# Altium PCB PCB1.PcbDoc
Units mm, origin at the board's own origin, x right, y up, seen from the top; angles counter-clockwise.
Board outline 24.38 x 55.12 mm, 2 copper layers (Top Layer, Bottom Layer); 36 components, 31 nets, 162 pads, 68 vias.
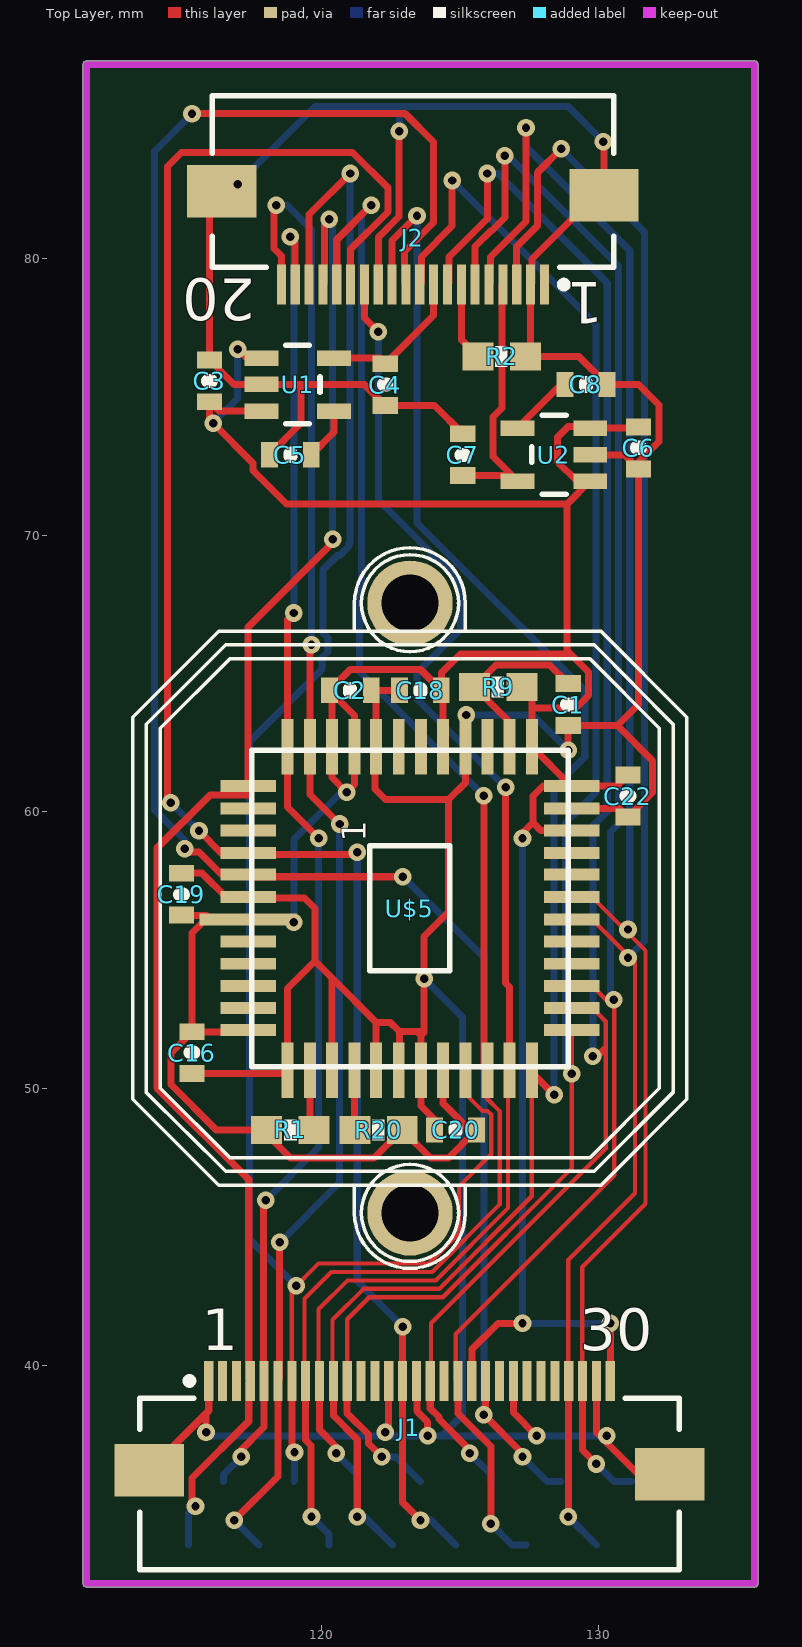
[diagram p0: Top Layer view]
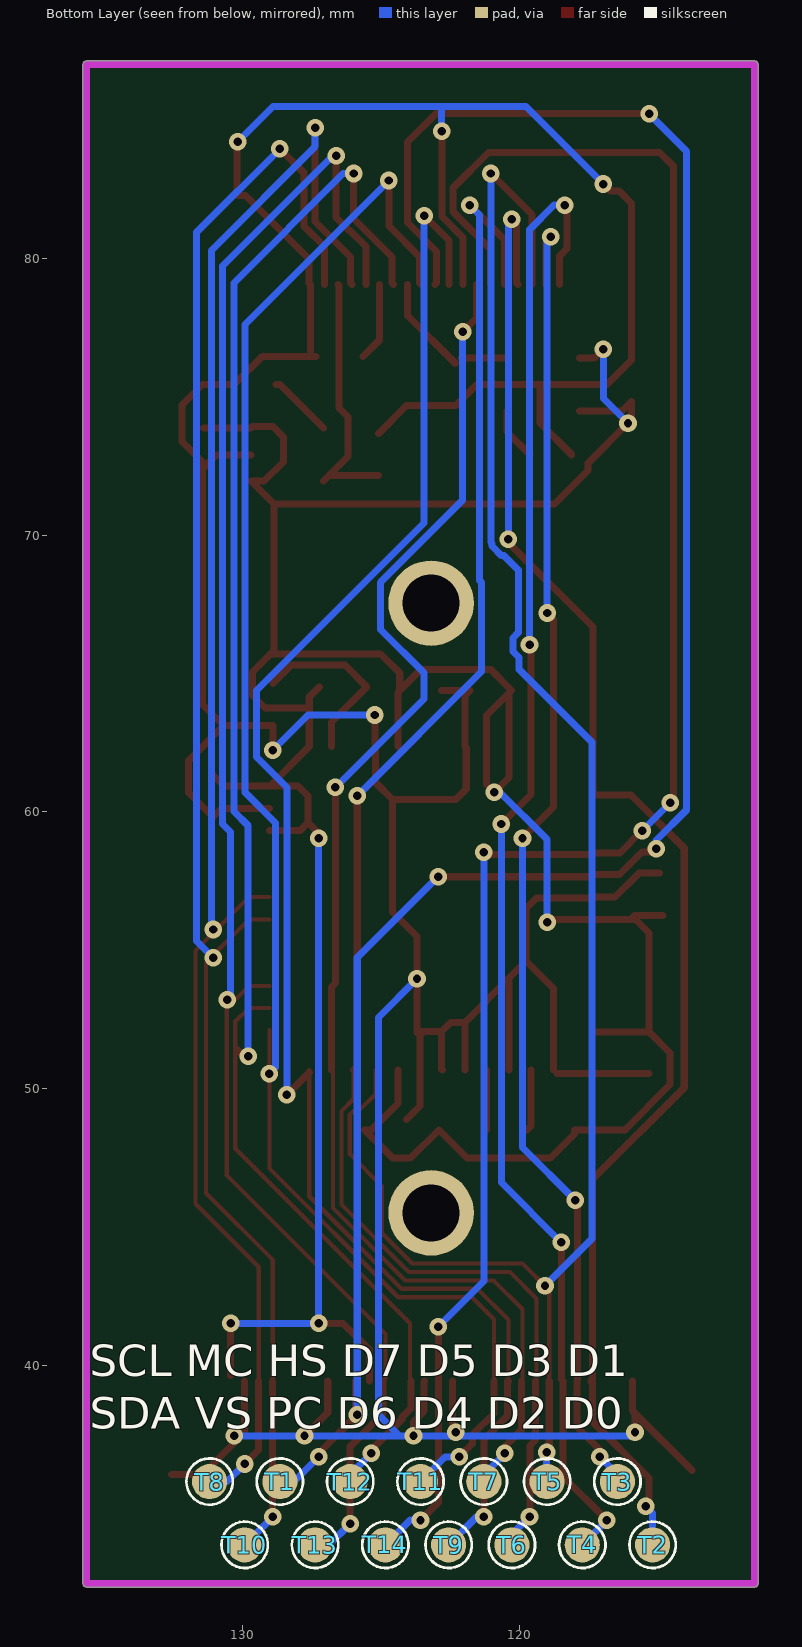
[diagram p1: Bottom Layer view, seen from below]

## Layer stack, top to bottom
Top Solder: solder mask 0.0102, Solder Resist, Dk 3.5
Top Layer: signal copper 0.0356
Dielectric 1: dielectric 0.32, FR-4, Dk 4.8
Bottom Layer: signal copper 0.0356
Bottom Solder: solder mask 0.0102, Solder Resist, Dk 3.5

## Board outline
111.379,32.131 ccw(c111.506,32.131) 111.506,32.004 135.636,32.004 ccw(c135.636,32.131) 135.763,32.131 135.763,86.995 ccw(c135.636,86.995) 135.636,87.122 111.506,87.122 ccw(c111.506,86.995) 111.379,86.995

## Design rules (kind name [scope] priority, off if disabled: settings)
Clearance [All] p1: gap=0.152
MinimumSolderMaskSliver [All] p1 off: minsoldermaskwidth=0.254
PolygonConnect [All] p1: connectstyle=Relief reliefconductorwidth=0.254 reliefentries=4 polygonreliefangle="90 Angle" airgapwidth=0.254
RoutingVias [All] p1: holewidth=0.305 width=0.635 viastyle="Through Hole" minholewidth=0.305 minwidth=0.635 maxholewidth=0.711 maxwidth=1.27
SilkToBoardRegionClearance [All] p1 off:
SilkToSilkClearance [All] p1 off: silktosilkclearance=0.254
SilkToSolderMaskClearance [IsPad] p1 off: minsilkscreentomaskgap=0.254 clearancetoexposedcopper=TRUE
SolderMaskExpansion [All] p1: expansion=0.102
UnpouredPolygon [All] p1: allowunpoured=FALSE
Width [All] p1: maxlimit=0.635 minlimit=0.152 preferedwidth=0.152
25 further rules are at their usual default settings.

## Components (designator, comment, footprint, x,y, rotation, side; value= is the part's Value field where it differs from the comment)
C1 "0u01" 0603-CAP 128.905,63.881 r270 top
C2 "0u1" 0603-CAP 121.031,64.389 r0 top
C3 "0u1" 0603-CAP 115.951,75.565 r90 top
C4 "0u1" 0603-CAP 122.301,75.438 r270 top
C5 "470p" 0603-CAP 118.872,72.898 r180 top
C6 "0u1" 0603-CAP 131.445,73.152 r270 top
C7 "0u1" 0603-CAP 125.095,72.898 r90 top
C8 "470p" 0603-CAP 129.54,75.438 r0 top
C16 "0u1" 0603-CAP 115.316,51.308 r270 top
C18 "0u1" 0603-CAP 123.571,64.389 r180 top
C19 "0u1" 0603-CAP 114.935,57.023 r90 top
C20 "0u1" 0603-CAP 124.841,48.514 r180 top
C22 "0u1" 0603-CAP 131.064,60.579 r270 top
J1 "746Camera" FFC/SM0.5-2H30 123.19,36.195 r0 top
J2 "OV7675Socket" FFC/SM0.5-2H20 120.777,82.296 r180 top
R1 "1k" 0603-RES 118.872,48.514 r180 top
R2 "1k" 0603-RES 126.492,76.454 r0 top
R9 "10k" 0603-RES 126.365,64.516 r0 top
R20 "1k" 0603-RES 122.047,48.514 r0 top
T1 "TestPad" PAD.05X.05 128.651,35.814 r180 bottom
T2 "TestPad" PAD.05X.05 115.189,33.528 r180 bottom
T3 "TestPad" PAD.05X.05 116.459,35.814 r180 bottom
T4 "TestPad" PAD.05X.05 117.729,33.528 r180 bottom
T5 "TestPad" PAD.05X.05 118.999,35.814 r180 bottom
T6 "TestPad" PAD.05X.05 120.269,33.528 r180 bottom
T7 "TestPad" PAD.05X.05 121.285,35.814 r180 bottom
T8 "TestPad" PAD.05X.05 131.191,35.814 r180 bottom
T9 "TestPad" PAD.05X.05 122.555,33.528 r180 bottom
T10 "TestPad" PAD.05X.05 129.921,33.528 r180 bottom
T11 "TestPad" PAD.05X.05 123.571,35.814 r180 bottom
T12 "TestPad" PAD.05X.05 126.111,35.814 r180 bottom
T13 "TestPad" PAD.05X.05 127.381,33.528 r180 bottom
T14 "TestPad" PAD.05X.05 124.841,33.528 r180 bottom
U1 "V_REG_LDOSMD" SOT23-5 119.126,75.438 r270 top
U2 "V_REG_LDOSMD" SOT23-5 128.397,72.898 r90 top
U$5 "MT9V034" CLCC-48 123.19,56.515 r90 top

## Footprints (in the part's own frame and the unit in brackets; to place one, negate y for a bottom-side part, rotate by r counter-clockwise, add the part's x,y. Pads: shape width x height; smd on the part's side, far side on the other; paste and mask are expansions set on the pad)
0603-CAP [mil] "0603-CAP"
  rect 24x36 smd: 1(-29.53,0) 2(30,0)
  silkscreen extent 0,-2 0,2
0603-RES [mil] "0603-RES"
  rect 44x40 smd: 1(-33.46,0) 2(34,0)
  silkscreen extent -9,-15 9,15
CLCC-48 [mil] "CLCC-48"
  rect 17x138 smd: 1(-15.75,230)
  rect 17x79 smd: 2(-47.24,230) 3(-78.74,230) 4(-110.24,230) 5(-141.73,230) 6(-173.23,230) 19(-173.23,-229.92) 20(-141.73,-229.92) 21(-110.24,-229.92) 22(-78.74,-229.92) 23(-47.24,-229.92) 24(-15.75,-229.92) 25(16,-229.92) 26(48,-229.92) 27(79,-229.92) 28(111,-229.92) 29(142,-229.92) 30(174,-229.92) 43(174,230) 44(142,230) 45(111,230) 46(79,230) 47(48,230) 48(16,230)
  rect 79x17 smd: 7(-229.92,174) 8(-229.92,142) 9(-229.92,111) 10(-229.92,79) 11(-229.92,48) 12(-229.92,16) 13(-229.92,-15.75) 14(-229.92,-47.24) 15(-229.92,-78.74) 16(-229.92,-110.24) 17(-229.92,-141.73) 18(-229.92,-173.23) 31(230,-173.23) 32(230,-141.73) 33(230,-110.24) 34(230,-78.74) 35(230,-47.24) 36(230,-15.75) 37(230,16) 38(230,48) 39(230,79) 40(230,111) 41(230,142) 42(230,174)
  round 121.5 hole 81: P$1(-433.07,0) P$2(434,0)
  silkscreen extent -512,-394 513,394
FFC/SM0.5-2H20 [mm]
  rect 0.33x1.45 smd: 1(-7.268,3.252) 2(-6.768,3.252) 3(-6.268,3.252) 4(-5.768,3.252) 5(-5.268,3.252) 6(-4.768,3.252) 7(-4.268,3.252) 8(-3.768,3.252) 9(-3.268,3.252) 10(-2.768,3.252) 11(-2.268,3.252) 12(-1.768,3.252) 13(-1.268,3.252) 14(-0.768,3.252) 15(-0.268,3.252) 16(0.232,3.252) 17(0.732,3.252) 18(1.232,3.252) 19(1.732,3.252) 20(2.232,3.252)
  rect 2.5x1.9 smd: 21(-9.418,0.027) 22(4.382,-0.123)
  silkscreen extent -9.77,-3.57 4.73,3.38, body extent -9.73,-3.58 4.7,2.59, height 2
FFC/SM0.5-2H30 [mm]
  rect 0.33x1.45 smd: 1(-7.268,3.252) 2(-6.768,3.252) 3(-6.268,3.252) 4(-5.768,3.252) 5(-5.268,3.252) 6(-4.768,3.252) 7(-4.268,3.252) 8(-3.768,3.252) 9(-3.268,3.252) 10(-2.768,3.252) 11(-2.268,3.252) 12(-1.768,3.252) 13(-1.268,3.252) 14(-0.768,3.252) 15(-0.268,3.252) 16(0.232,3.252) 17(0.732,3.252) 18(1.232,3.252) 19(1.732,3.252) 20(2.232,3.252) 21(2.732,3.252) 22(3.232,3.252) 23(3.732,3.252) 24(4.232,3.252) 25(4.732,3.252) 26(5.232,3.252) 27(5.732,3.252) 28(6.232,3.252) 29(6.732,3.252) 30(7.232,3.252)
  rect 2.5x1.9 smd: 31(-9.418,0.027) 32(9.382,-0.123)
  silkscreen extent -9.77,-3.57 9.73,3.38, body extent -9.77,-3.57 9.73,2.63, height 2
PAD.05X.05 [mm] "PAD.05X.05"
  rrect100% 1.27x1.27 smd: 1(0,0)
  silkscreen extent -0.84,-0.84 0.84,0.84
SOT23-5 [mil] "SOT23-5"
  rect 22x48 smd: 1(-37.4,-51.18) 2(0,-51.18) 3(38,-51.18) 4(38,52) 5(-37.4,52)
  silkscreen extent -56,-17 56,32

## Part data
C1 C2 C3 C4 C5 C6 C7 C8 C16 C18 C19 C20 C22: library part CAP0402-CAP, "<b>Capacitor</b> / Standard 0603 ceramic capacitor, and 0.1\" leaded capacitor."
R1 R2 R9 R20: library part RESISTOR0402-RES, "<b>Resistor</b> / Basic schematic elements and footprints for 0603, 1206, and PTH 1/10th watt (small) resistors."
U1 U2: "<b>Voltage Regulator LDO</b> / Standard 150mA LDO voltage regulator in SOT-23 layout. Micrel part MIC5205. BP (by-pass) pin is used to lower output noise with 470pF cap."

## Via types
v1: diameter 0.635, hole 0.305, Top Layer to Bottom Layer, 68 vias

## Nets (pads, with @x,y where several pads share a name; then routed paths per layer and width w, separated by ;. In a path a pad name is that pad's centre, name@x,y a point inside that pad or via, vN(x,y) a via of type N, cw(c..) or ccw(c..) an arc to the next point about the centre after c; other vN are vias at no path point)
1.8: C4.1 J2.9 U1.5 | length 5.2
  Top Layer w0.254: U1.5 C4.1@122.101,76.388 ; C4.1 124.045,77.932 J2.9
2.8: C7.1 J2.4 U2.5 | length 9.4
  Top Layer w0.254: C7.1 U2.5@126.876,72.148 ; J2.4 126.517,79.017 126.517,74.589 126.187,74.258 126.187,72.837 U2.5@126.876,72.148 ; U2.5 U2.5@126.876,72.148
3.3: C2.1 C3.1 C6.1 C16.1 C18.1 C19.1 C20.1 C22.1 J1.20 J1.30 R1.2 R9.2 R20.2 U1.1 U1.3 U2.1 U2.3 U$5.1 U$5.6 U$5.14 U$5.28 U$5.30 U$5.31 U$5.35 U$5.39 U$5.40 | length 129.4
  Top Layer w0.254: C19.1@114.808,56.261 115.836,56.261 U$5.1@115.982,56.115 ; v1(116.967,76.708) 117.287,76.388 U1.1 ; U$5.6@117.291,52.058 C16.1 ; U1.3 116.293,74.473 C3.1 115.951,74.168 v1(116.078,74.041) 117.526,72.593 117.526,72.325 118.731,71.12 128.869,71.12 ; v1(118.999,56.007) 118.891,56.115 U$5.1 U$5.1@115.982,56.115 ; U$5.14 124.39,49.473 125.349,48.514 C20.1 124.575,47.498 123.927,47.498 R20.2 121.895,47.498 118.872,47.498 118.008,48.362 R1.2 116.191,48.514 114.554,50.151 114.554,51.296 C16.1 ; U$5.35 124.39,64.32 C18.1 ; J1.20 125.422,40.586 126.365,41.529 v1(127.254,41.529) ; R9.2 127.59,64.155 127.59,63.754 ; v1(127.254,59.055) 127.254,59.233 127.635,59.614 ; U$5.28 127.914,59.334 127.635,59.614 ; J1.30@130.429,39.651 v1(130.429,41.529) ; C22.1 130.67,60.935 U$5.30 U$5.30@129.012,60.935 ; C6.1@131.406,73.863 U2.3 129.646,73.914 128.905,73.914 128.524,73.533 128.524,72.644 129.22,71.948 U2.1 128.869,71.12 ; C16.1 115.316,55.626 115.805,56.115 U$5.1@115.982,56.115 ; C2.1@120.371,64.299 121.183,63.487 U$5.39 121.183,60.985 v1(120.904,60.706) 120.371,61.239 U$5.40 C2.1@120.371,64.299 ; C2.1@120.371,64.299 C2.1 121.043,65.151 123.559,65.151 C18.1 ; C18.1 124.321,65.012 125.019,65.71 128.983,65.71 ; 127.59,63.754 U$5.31 U$5.30@129.012,60.935 ; 127.59,63.754 129.185,63.754 129.642,64.21 129.642,65.052 128.983,65.71 ; 127.635,59.614 127.635,60.579 127.991,60.935 U$5.30@129.012,60.935 ; 128.869,71.12 128.869,65.824 128.983,65.71
  Bottom Layer w0.254: v1(116.078,74.041) 116.967,74.93 v1(116.967,76.708) ; v1(118.999,56.007) 118.999,59.01 120.695,60.706 v1(120.904,60.706) ; v1(127.254,59.055) v1(127.254,41.529) v1(130.429,41.529)
CAM_NRESET: C1.1 R9.1 U$5.32 | length 6.7
  Top Layer w0.254: U$5.32 126.79,63.241 R9.1 126.302,65.303 128.233,65.303 C1.1
DCMI_D0: J1.4 J2.17 T2.1 U$5.43 | length 56.3
  Top Layer w0.254: v1(115.443,34.925) 115.316,35.052 115.316,35.941 117.367,37.992 117.367,39.392 J1.4 117.367,39.503 117.367,46.717 114.046,50.038 114.046,58.688 115.975,60.617 117.348,60.617 U$5.43 117.348,66.675 120.396,69.723 v1(120.396,69.85) ; J2.17 120.1,79.099 120.1,81.238 v1(120.269,81.407)
  Bottom Layer w0.254: T2.1 115.189,34.671 v1(115.443,34.925) ; v1(120.269,81.407) 120.396,81.28 v1(120.396,69.85)
DCMI_D1: J1.5 J2.19 T3.1 U$5.42 | length 48.8
  Top Layer w0.254: v1(117.094,36.703) 117.094,36.957 117.922,37.785 J1.5 117.894,39.476 117.894,45.885 v1(117.983,45.974) ; v1(118.872,80.772) 119.045,80.599 J2.19 ; v1(118.999,67.183) 118.77,66.954 U$5.42 118.77,60.173 v1(119.888,59.055)
  Bottom Layer w0.254: T3.1 116.459,36.068 v1(117.094,36.703) ; v1(117.983,45.974) 119.888,47.879 v1(119.888,59.055) ; v1(118.872,80.772) 118.999,80.645 v1(118.999,67.183)
DCMI_D2: J1.6 J2.20 T4.1 U$5.41 | length 54.6
  Top Layer w0.254: v1(116.84,34.417) 118.422,35.999 J1.6 118.478,39.503 118.478,44.437 v1(118.491,44.45) ; v1(118.364,81.915) 118.275,81.826 118.275,80.353 118.545,80.083 J2.20 ; v1(119.634,66.04) 119.583,65.989 U$5.41 119.583,60.63 v1(120.65,59.563)
  Bottom Layer w0.254: v1(116.84,34.417) T4.1 ; v1(118.364,81.915) 118.745,81.915 119.634,81.026 v1(119.634,66.04) ; v1(118.491,44.45) 120.65,46.609 v1(120.65,59.563)
DCMI_D3: J1.7 J2.18 T5.1 U$5.15 | length 67.9
  Top Layer w0.152: J1.7 118.922,42.722 119.888,43.688 123.868,43.688 124.962,44.781 124.962,46.476 126.124,47.638 126.124,49.066 125.99,49.2 125.806,49.2 125.19,49.816 U$5.15
  Top Layer w0.254: J1.7 118.922,36.965 v1(119.019,36.868) ; J2.18 119.545,81.572 v1(121.031,83.058)
  Bottom Layer w0.254: T5.1 119.019,35.834 v1(119.019,36.868) ; v1(119.075,42.885) 117.386,44.574 117.386,62.522 120.015,65.151 120.015,65.577 120.231,65.793 120.231,66.287 120.04,66.478 120.04,68.732 120.561,69.253 120.643,69.253 120.993,69.603 120.993,69.685 121.031,69.723 v1(121.031,83.058)
DCMI_D4: J1.8 J2.16 T6.1 U$5.16 | length 59.5
  Top Layer w0.152: J1.8 119.38,39.49 119.38,42.418 120.345,43.383 123.995,43.383 126.429,45.818 126.429,49.192 125.964,49.657 125.99,49.657 U$5.16
  Top Layer w0.254: J1.8 119.422,37.309 119.616,37.115 119.616,34.562 v1(119.634,34.544) ; J2.16 120.545,80.667 v1(121.793,81.915) ; v1(125.857,60.579) 125.857,50.808 U$5.16
  Bottom Layer w0.254: v1(119.634,34.544) 120.269,33.909 T6.1 ; v1(121.793,81.915) 121.437,81.559 121.437,68.363 121.368,68.293 121.368,65.068 v1(125.857,60.579)
DCMI_D5: J1.9 J2.14 T7.1 U$5.17 | length 52
  Top Layer w0.152: J1.9 119.888,39.482 119.888,42.037 120.929,43.078 124.121,43.078 126.734,45.691 126.734,50.619 U$5.17
  Top Layer w0.254: J1.9 119.922,37.685 120.523,37.084 v1(120.523,36.83) ; J2.14 121.545,77.845 v1(122.047,77.343) ; v1(126.644,60.884) 126.644,53.823 126.79,53.677 U$5.17
  Bottom Layer w0.254: v1(120.523,36.83) 121.285,36.068 T7.1 ; v1(122.047,77.343) 122.047,71.259 125.012,68.293 125.012,66.592 123.444,65.024 123.444,64.084 v1(126.644,60.884)
DCMI_D6: J1.10 J2.12 T9.1 U$5.18 | length 61.5
  Top Layer w0.152: J1.10 120.396,39.474 120.396,41.656 121.514,42.774 124.247,42.774 127.59,46.116 127.59,50.591 U$5.18
  Top Layer w0.254: J1.10@120.396,39.421 J1.10 120.422,38.201 121.285,37.338 v1(121.285,34.544) ; J2.12 122.545,80.635 v1(123.444,81.534) ; U$5.18@127.59,50.591 v1(128.397,49.784)
  Bottom Layer w0.254: v1(121.285,34.544) 121.539,34.544 T9.1 ; v1(123.444,81.534) 123.444,70.437 129.502,64.379 129.502,61.983 128.397,60.878 v1(128.397,49.784)
DCMI_D7: J1.11 J2.10 T11.1 U$5.19 | length 61.8
  Top Layer w0.152: J1.11 120.922,41.674 121.717,42.469 124.373,42.469 129.03,47.125 U$5.19
  Top Layer w0.254: J1.11 120.922,38.275 121.691,37.506 121.691,37.186 v1(122.174,36.703) ; J2.10 123.6,79.099 123.6,80.048 124.71,81.157 124.714,81.153 v1(124.714,82.804)
  Bottom Layer w0.254: v1(122.174,36.703) 122.682,36.703 T11.1 ; v1(124.714,82.804) 129.908,77.61 129.908,60.71 128.803,59.605 128.803,50.775 v1(129.032,50.546)
DCMI_D8: U$5.45
DCMI_D9: U$5.44
DCMI_HSYNC: J1.17 J2.8 T12.1 U$5.20 | length 60.8
  Top Layer w0.152: J1.17 123.952,39.477 123.952,41.529 130.262,47.839 130.262,52.426 129.773,52.915 U$5.20
  Top Layer w0.254: J1.17 123.922,38.45 124.231,38.141 124.231,38.075 125.349,36.957 v1(125.349,36.83) ; J2.8 124.6,79.099 124.6,80.048 125.972,81.419 125.984,81.407 v1(125.984,83.058) ; v1(129.794,51.181) 129.957,51.181 130.211,51.435
  Bottom Layer w0.254: v1(125.349,36.83) 126.111,36.068 T12.1 ; v1(125.984,83.058) 126.365,83.058 130.315,79.108 130.315,60.02 129.794,59.5 v1(129.794,51.181)
DCMI_PIXCK: J1.15 J2.15 T14.1 U$5.46 | length 70.1
  Top Layer w0.254: v1(114.554,60.325) 114.427,60.452 114.427,83.312 114.935,83.82 121.113,83.82 122.39,82.543 122.39,81.668 121.045,80.322 J2.15 ; v1(115.57,59.322) 116.37,58.522 U$5.46 117.411,58.458 121.196,58.458 v1(121.285,58.547) ; v1(122.936,41.402) 122.922,41.388 J1.15 122.922,35.066 v1(123.571,34.417)
  Bottom Layer w0.254: v1(114.554,60.325) 115.557,59.322 v1(115.57,59.322) ; v1(121.285,58.547) 121.285,43.053 v1(122.936,41.402) ; v1(123.571,34.417) 123.952,34.417 T14.1
DCMI_VSYNC: J1.19 J2.6 T13.1 U$5.21 | length 62.8
  Top Layer w0.152: J1.19 124.841,39.529 124.841,41.148 130.567,46.874 130.567,52.921 129.773,53.715 U$5.21
  Top Layer w0.254: J1.19 124.922,38.273 126.111,37.084 v1(126.111,34.29) ; J2.6 125.545,80.418 126.127,81.001 126.152,81.001 126.619,81.467 v1(126.619,83.693)
  Bottom Layer w0.254: v1(126.111,34.29) 126.873,33.528 T13.1 ; v1(126.619,83.693) 126.746,83.693 130.721,79.718 130.721,59.56 130.429,59.268 v1@130.429,53.34 ; v1@130.429,53.213 v1@130.429,53.34 ; v1@130.429,53.467 v1@130.429,53.34 ; v1(130.556,53.213) v1@130.429,53.34
GND: C1.2 C2.2 C3.2 C4.2 C5.2 C6.2 C7.2 C8.2 C16.2 C18.2 C19.2 C20.2 C22.2 J1.1 J1.14 J1.16 J1.23 J1.29 J1.31 J1.32 J2.2 J2.13 J2.21 J2.22 R2.2 U1.2 U2.2 U$5.7 U$5.9 U$5.11 U$5.12 U$5.13 U$5.29 U$5.34 U$5.38 U$5.48 | length 182.4
  Top Layer w0.254: J1.31 115.922,38.372 ; C19.2 115.683,57.785 116.546,56.921 U$5.48 117.373,56.896 119.38,56.896 119.761,56.515 119.761,54.61 ; C16.2 U$5.7@118.641,50.546 ; v1(115.824,37.592) 115.824,38.274 115.922,38.372 ; J1.1 115.922,38.372 ; v1(116.967,82.677) 116.709,82.419 J2.22 115.951,81.975 C3.2 116.84,75.438 U1.2 119.253,75.438 ; C5.2 119.253,74.041 119.253,75.438 ; U$5.7 118.77,53.619 119.761,54.61 ; U$5.9 120.371,54 ; U$5.11 121.971,52.4 ; J2.13 122.045,80.748 122.796,81.499 122.796,84.569 v1(122.809,84.582) ; v1(122.301,37.592) 122.422,37.471 J1.14 ; U$5.12 122.809,50.7 122.809,52.07 ; C18.2 C2.2 121.971,64.211 U$5.38 121.92,62.306 121.92,60.833 122.301,60.452 124.587,60.452 ; J1.16 123.444,39.426 123.444,38.354 123.825,37.973 v1(123.825,37.465) ; C20.2@124.079,48.895 123.59,49.384 U$5.13 123.59,51.924 ; C7.2 124.079,74.676 C4.2 121.539,75.438 119.253,75.438 ; v1(125.222,63.5) 125.222,62.389 U$5.34 125.19,61.055 124.587,60.452 ; J1.23 126.922,38.305 v1(127.762,37.465) ; R2.2 129.286,76.454 C8.2 131.445,75.438 132.182,74.701 132.182,73.38 131.445,72.643 C6.2 ; R2.2@127.545,76.643 J2.2 127.6,79.099 127.6,79.975 129.894,82.269 J2.21 130.195,84.181 v1(130.175,84.201) ; v1(128.905,62.23) C1.2 130.683,63.119 ; U$5.29 130.759,60.122 C22.2 131.953,60.706 131.953,61.849 130.683,63.119 ; U2.2 130.937,72.898 C6.2 ; J1.29 129.922,37.591 131.441,36.072 J1.32 ; 119.761,54.61 120.371,54 ; 120.371,54 121.971,52.4 ; 121.971,52.4 122.479,52.4 122.809,52.07 ; 122.809,52.07 123.444,52.07 ; 123.444,52.07 123.66,52.07 123.698,52.032 ; 123.444,52.07 123.59,51.924 ; 123.59,51.924 123.698,52.032 ; 123.698,52.032 v1(123.698,53.975) 123.698,55.499 124.587,56.388 124.587,60.452 ; 130.683,63.119 131.445,63.881 C6.2
  Bottom Layer w0.254: v1(115.824,37.592) 115.951,37.465 122.428,37.465 124.333,37.465 ; v1(116.967,82.677) 119.761,85.471 122.809,85.471 ; v1(122.809,84.582) 122.809,85.471 ; v1(123.698,53.975) 125.095,52.578 125.095,38.227 124.333,37.465 ; v1(123.825,37.465) 124.333,37.465 ; v1(125.222,63.5) 127.635,63.5 v1(128.905,62.23) ; v1(130.175,84.201) 128.905,85.471 122.809,85.471 ; v1(130.302,37.465) v1(127.762,37.465) 124.333,37.465
I2C2_SCL: J1.28 J2.5 T8.1 U$5.25 | length 61.5
  Top Layer w0.152: U$5.25 129.766,56.921 131.699,54.989 131.699,45.847 129.413,43.561 129.413,39.457 J1.28
  Top Layer w0.254: J2.5 126.1,79.099 126.1,80.048 127.381,81.329 v1(127.381,84.709) ; J1.28 129.422,36.948 v1(129.921,36.449)
  Bottom Layer w0.254: v1(127.381,84.709) 127.381,84.025 131.127,80.278 131.127,55.816 v1(131.064,55.753) ; v1(129.921,36.449) 130.556,35.814 T8.1
I2C2_SDA: J1.27 J2.3 T10.1 U$5.24 | length 61.7
  Top Layer w0.152: J1.27 128.905,39.465 128.905,43.815 131.318,46.228 131.318,54.57 129.773,56.115 U$5.24
  Top Layer w0.254: J2.3 127.045,80.418 127.787,81.161 127.787,83.083 v1(128.651,83.947) ; v1(128.905,34.544) 128.922,34.561 J1.27
  Bottom Layer w0.254: v1(128.651,83.947) 131.661,80.937 131.661,55.334 v1(131.064,54.737) ; v1(128.905,34.544) T10.1
NetC5_1: C5.1 U1.4 | length 1.9
  Top Layer w0.254: C5.1 120.447,73.723 U1.4
NetC8_1: C8.1 U2.4 | length 2.4
  Top Layer w0.254: U2.4 128.651,75.438 C8.1
NetJ1_25: J1.25
NetJ1_26: J1.26
NetJ2_7: J2.7 R2.1 | length 2.8
  Top Layer w0.254: J2.7 125.045,77.051 R2.1
NetR1_1: R1.1 U$5.8 | length 2.2
  Top Layer w0.254: U$5.8 119.583,48.653 R1.1
NetR20_1: R20.1 U$5.10 | length 2.2
  Top Layer w0.254: U$5.10 121.183,48.528 R20.1
TIM5_CH3_EXPOSURE: U$5.23
TIM5_CH4_STANDBY: U$5.33
TIM8_CH3_MASTERCLOCK: J1.21 J2.11 T1.1 U$5.47 | length 76.4
  Top Layer w0.254: v1(115.062,58.674) 115.189,58.547 115.57,58.547 116.383,57.734 U$5.47 117.424,57.658 v1(122.936,57.658) ; v1(115.316,85.217) 123.018,85.217 124.041,84.194 124.041,81.287 122.989,80.235 122.989,79.099 J2.11 ; J1.21 125.922,38.292 v1(125.857,38.227) 127.254,36.83 v1(127.254,36.703)
  Bottom Layer w0.254: v1(115.062,58.674) 115.062,58.973 113.957,60.078 113.957,83.858 v1(115.316,85.217) ; v1(122.936,57.658) 125.857,54.737 v1(125.857,38.227) ; v1(127.254,36.703) 128.143,35.814 T1.1
TIM8_CH4_LED_OUT: U$5.27
pads on no net: J1.2 J1.3 J1.12 J1.13 J1.18 J1.22 J1.24 J2.1 U$5.2 U$5.3 U$5.4 U$5.5 U$5.22 U$5.26 U$5.36 U$5.37 U$5.P$1 U$5.P$2

## Keep-outs
Keep-Out Layer:
  lines w0.254: 111.506,32.131 111.506,86.995 135.636,86.995 135.636,32.131 111.506,32.131

## Silkscreen, mask and mechanical layers (free items; w line width, h text height)
Bottom Overlay:
  text "SCL MC HS D7 D5 D3 D1" at 135.509,39.624 h1.14
  text "SDA VS PC D6 D4 D2 D0" at 135.509,37.719 h1.14

## Text inside footprints (layer, text, board x,y; h text height)
J1: Top Overlay "1" at 115.672,40.547 h1.5; Top Overlay "30" at 129.322,40.547 h1.5
J2: Top Overlay "20" at 117.602,79.248 h1.5 r180; Top Overlay "1" at 130.175,79.121 h1.5 r180
U$5: Top Overlay "1" at 121.59,58.928 h0.86 r90